# Altium PCB Papilio_WM.PcbDoc
Units mil, origin at the board's own origin, x right, y up, seen from the top; angles counter-clockwise.
Board outline 1830.71 x 1425.2 mil, 2 copper layers (Top Layer, Bottom Layer); 55 components, 34 nets, 144 pads, 628 vias.
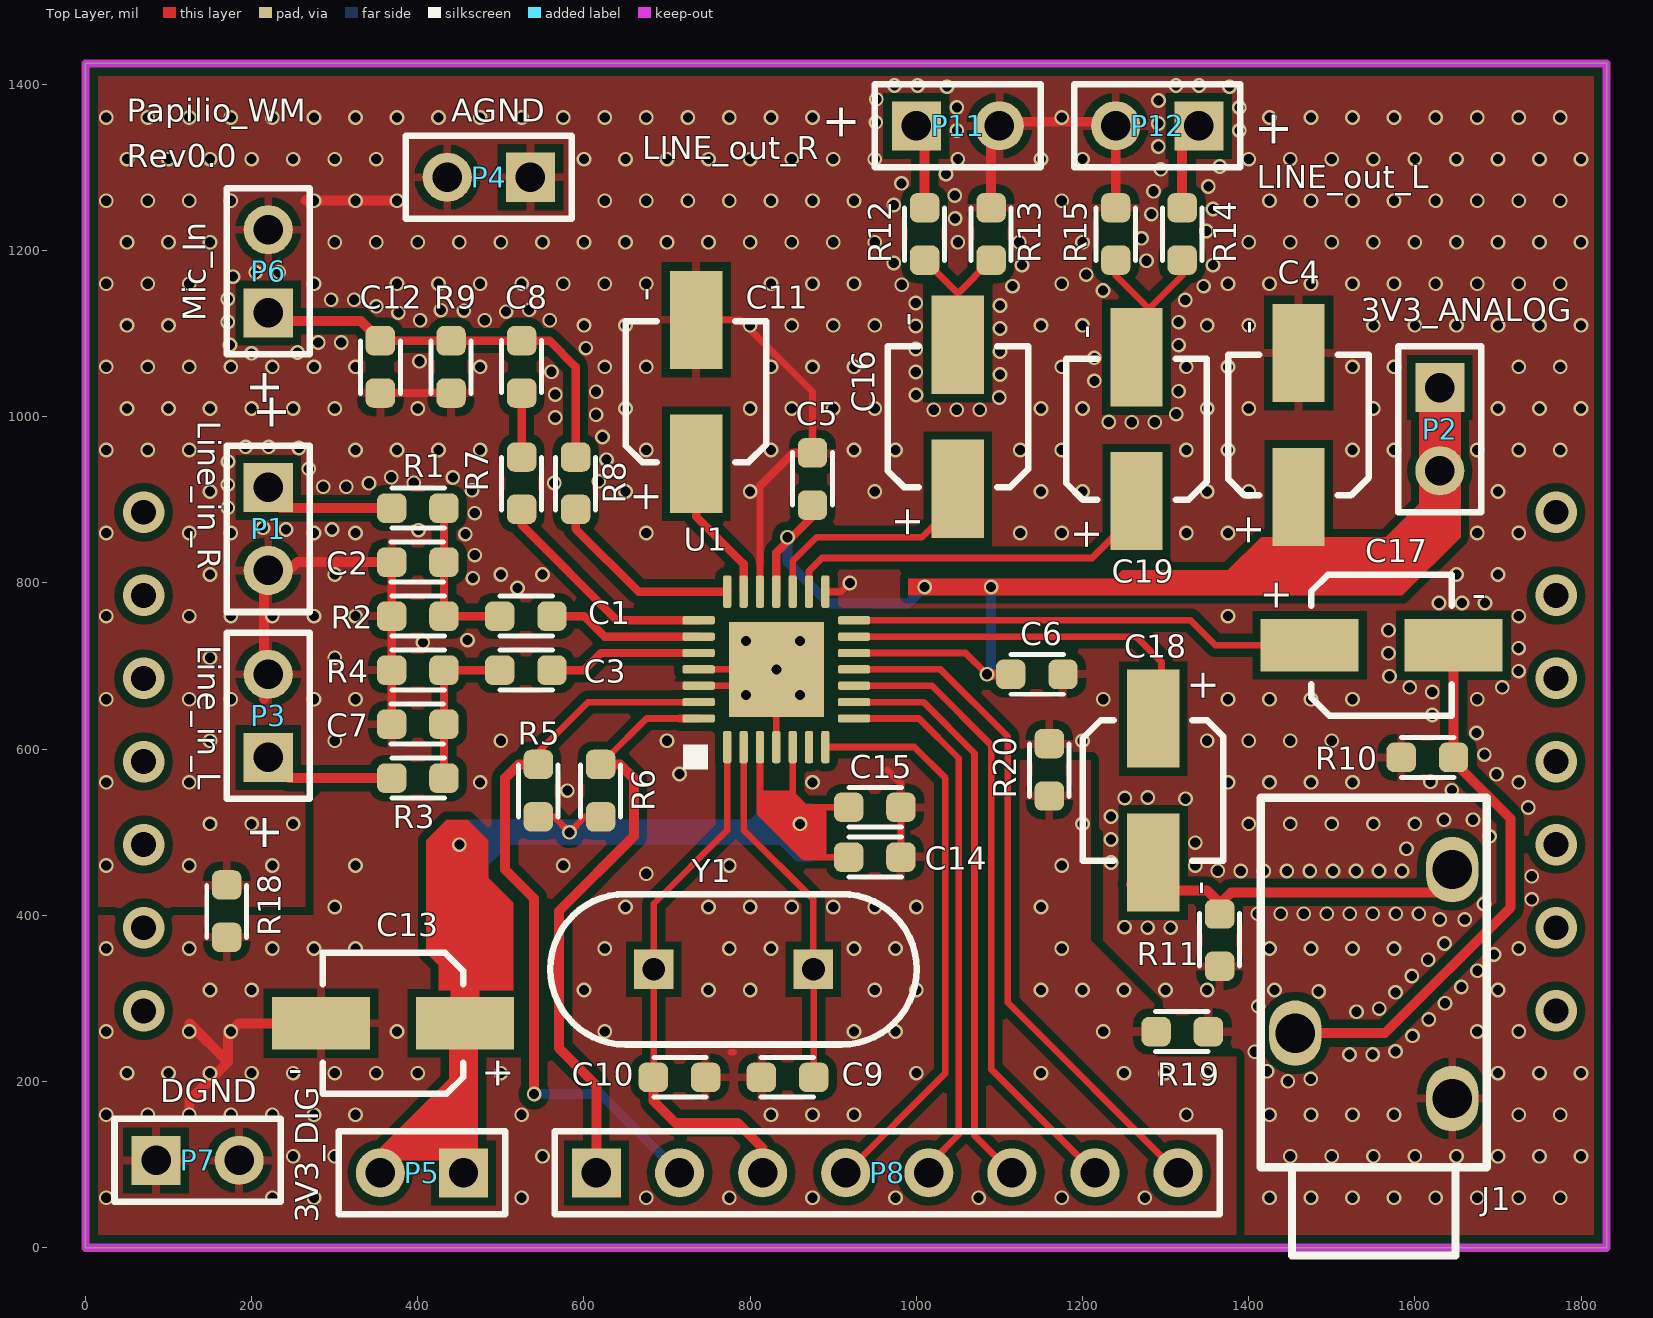
[diagram p0: Top Layer view]
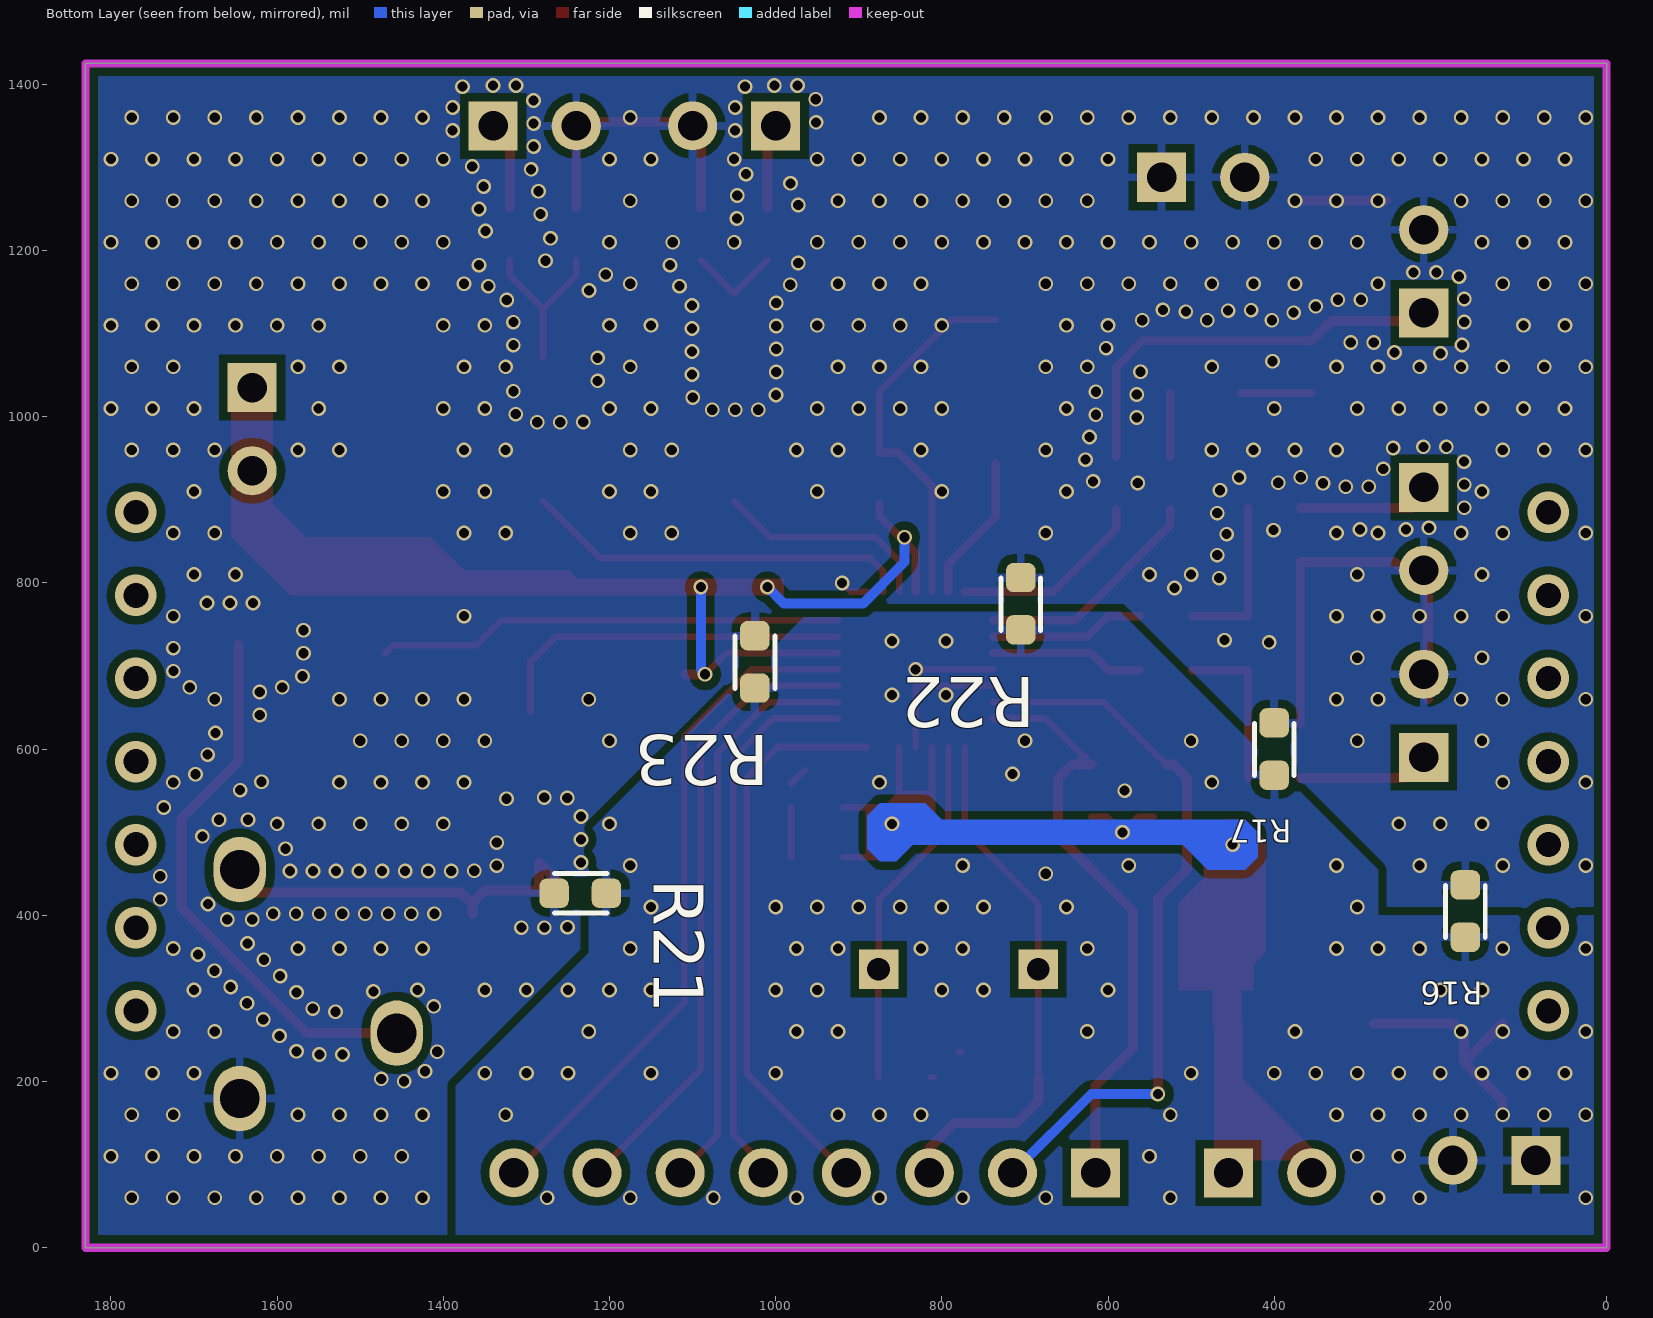
[diagram p1: Bottom Layer view, seen from below]
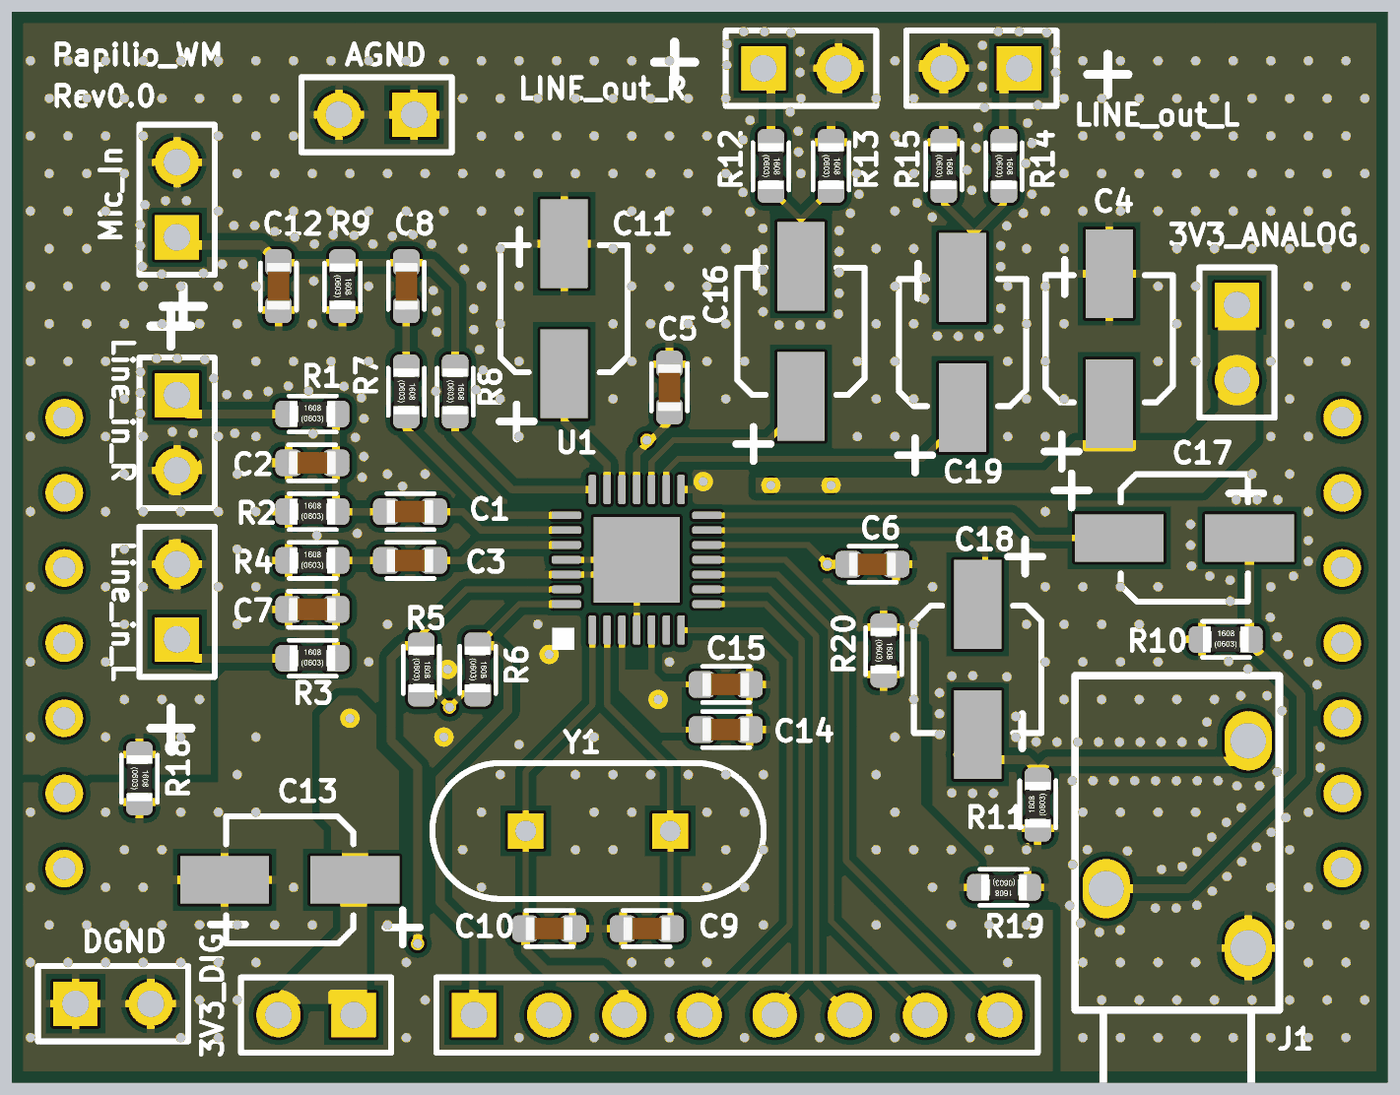
[diagram p2: 3D render of the assembled board from above, using the file's embedded part models]
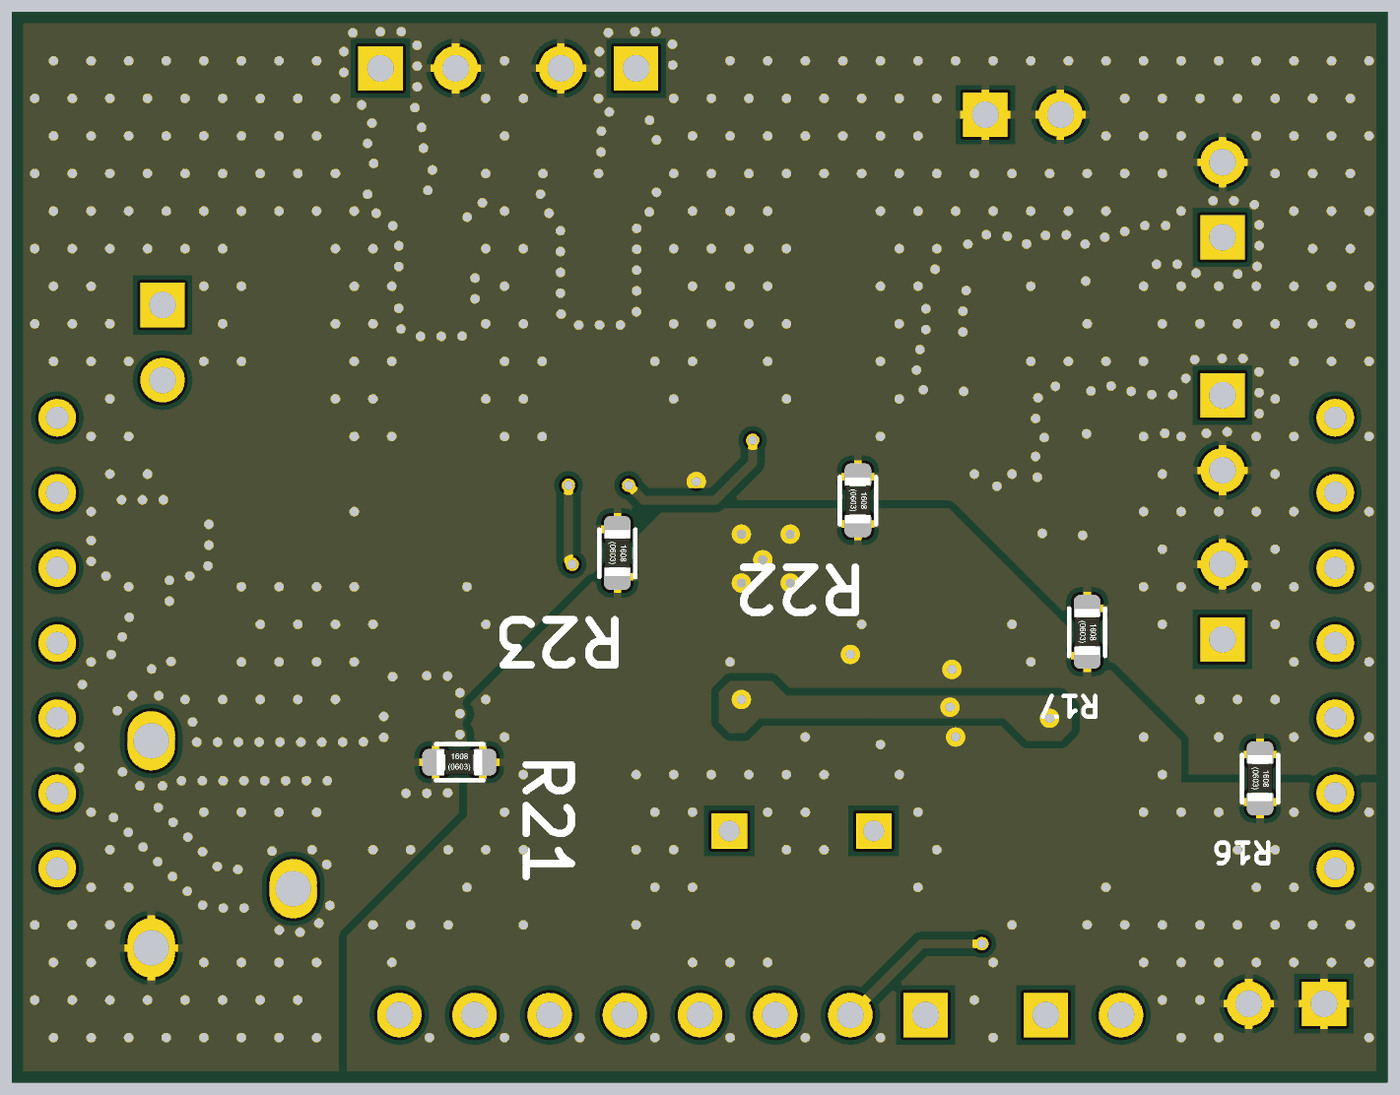
[diagram p3: 3D render of the assembled board from below, using the file's embedded part models]

## Layer stack, top to bottom
Top Solder: solder mask 0.4, Solder Resist, Dk 3.5
Top Layer: signal copper 1.4
Dielectric 1: dielectric 12.6, FR-4, Dk 4.8
Bottom Layer: signal copper 1.4
Bottom Solder: solder mask 0.4, Solder Resist, Dk 3.5

## Board outline
0,0 1830.71,0 1830.71,1425.2 0,1425.2

## Design rules (kind name [scope] priority, off if disabled: settings)
Clearance [All] p1: gap=10 ignorepadtopadclearanceinfootprint=FALSE except(0: Arc-Hole Track-Hole SMDPad-Hole THPad-Hole Via-Hole Fill-Hole Poly-Hole Region-Hole Text-Hole; 6: Arc-Text Track-Text SMDPad-SMDPad SMDPad-Text THPad-Text Via-Text Fill-Text Poly-Text Region-Text Text-Text; 8: Arc-Arc Arc-Track Arc-SMDPad Track-Track Track-SMDPad)
HoleSize [All] p1: absolutevalues=TRUE maxlimit=100 minlimit=12.2 maxpercent=80.000 minpercent=20.000
MinimumSolderMaskSliver [All] p1: minsoldermaskwidth=3.94
PolygonConnect [All] p1: thpad.connectstyle=Relief thpad.reliefconductorwidth=10 thpad.reliefentries=4 thpad.polygonreliefangle="90 Angle" thpad.airgapwidth=10 smdpad.connectstyle=Relief smdpad.reliefconductorwidth=10 smdpad.reliefentries=4 smdpad.polygonreliefangle="90 Angle" smdpad.airgapwidth=10 via.connectstyle=Direct via.reliefconductorwidth=10 via.reliefentries=4 via.polygonreliefangle="90 Angle" via.airgapwidth=10
RoutingVias [All] p1: holewidth=28 width=50 viastyle="Through Hole" minholewidth=28 minwidth=50 maxholewidth=28 maxwidth=50 useviatemplates=TRUE viatemplateguid#1={E91FFBB6-2468-46B7-9EDF-650C0B199D72} viatemplatename#1=v45h31
SilkToSilkClearance [All] p1: silktosilkclearance=1.97
SilkToSolderMaskClearance [IsPad] p1: minsilkscreentomaskgap=1.97 clearancetoexposedcopper=TRUE
SolderMaskExpansion [All] p1: expansion=4
Width [All] p1: maxlimit=35 minlimit=8 preferedwidth=12 minimp=50.000000 maximp=50.000000 favimp=50.000000
26 further rules are at their usual default settings.

## Components (designator, comment, footprint, x,y, rotation, side; value= is the part's Value field where it differs from the comment)
C1 "Cap" "C0603 - rounded" 530,760 r180 top value=10uF
C2 "Cap" "C0603 - rounded" 400,825 r0 top value=10uF
C3 "Cap" "C0603 - rounded" 530,695 r180 top value=10uF
C4 "Cap2" "CAP Eletrolitico 4x5.3 SMD" 1460,990 r270 top value=10uF
C5 "Cap" "C0603 - rounded" 875,925 r270 top value=100nF
C6 "Cap" "C0603 - rounded" 1145,690 r180 top value=100nF
C7 "Cap" "C0603 - rounded" 400,630 r0 top value=10uF
C8 "Cap" "C0603 - rounded" 525,1060 r270 top value=1uF
C9 "Cap" "C0603 - rounded" 845,205 r0 top value=22pF
C10 "Cap" "C0603 - rounded" 715,205 r180 top value=22pF
C11 "Cap2" "CAP Eletrolitico 4x5.3 SMD" 735,1030 r270 top value=10uF
C12 "Cap" "C0603 - rounded" 355,1060 r90 top value=220pF
C13 "Cap2" "CAP Eletrolitico 4x5.3 SMD" 370,270 r0 top value=10uF
C14 "Cap" "C0603 - rounded" 950,470 r180 top value=100nF
C15 "Cap" "C0603 - rounded" 950,530 r180 top value=100nF
C16 "Cap2" "CAP Eletrolitico 4x5.3 SMD" 1050,1000 r270 top value=10uF
C17 "Cap2" "CAP Eletrolitico 4x5.3 SMD" 1560,725 r180 top value=220uF
C18 "Cap2" "CAP Eletrolitico 4x5.3 SMD" 1285,550 r90 top value=220uF
C19 "Cap2" "CAP Eletrolitico 4x5.3 SMD" 1265,985 r270 top value=10uF
J1 "Stereo audio connector" "HEADPHONE PLUG" 1550.51,317.2 r90 top
P1 "Line_in_R" "HDR1X2 signed" 220,915 r90 top
P2 "3V3_ANALOG" HDR1X2 1630,1035 r270 top
P3 "Line_in_L" "HDR1X2 signed" 220,590 r270 top
P4 "AGND" HDR1X2 535.47,1288.19 r180 top
P5 "3V3_DIG" HDR1X2 455,90 r180 top
P6 "Mic_In" "HDR1X2 signed" 220,1125 r270 top
P7 "DGND" HDR1X2 85,105 r0 top
P8 "Header 8" HDR1X8 615,90 r0 top
P11 "LINE_out_R" "HDR1X2 signed" 1000,1350 r180 top
P12 "LINE_out_L" "HDR1X2 signed" 1340,1350 r0 top
R1 "Res1" "R0603 - rounded" 400,890 r0 top value=4k7
R2 "Res1" "R0603 - rounded" 400,760 r0 top value=4k7
R3 "Res1" "R0603 - rounded" 400,565 r0 top value=4k7
R4 "Res1" "R0603 - rounded" 400,695 r0 top value=4k7
R5 "Res1" "R0603 - rounded" 545,550 r270 top value=4k7
R6 "Res1" "R0603 - rounded" 620,550 r270 top value=4k7
R7 "Res1" "R0603 - rounded" 525,920 r270 top value=10k
R8 "Res1" "R0603 - rounded" 590,920 r270 top value=680R
R9 "Res1" "R0603 - rounded" 440,1060 r270 top value=47k
R10 "Res1" "R0603 - rounded" 1615,590 r0 top value=22k
R11 "Res1" "R0603 - rounded" 1365,370 r90 top value=22k
R12 "Res1" "R0603 - rounded" 1010,1220 r270 top value=100R
R13 "Res1" "R0603 - rounded" 1090,1220 r270 top value=47k
R14 "Res1" "R0603 - rounded" 1320,1220 r270 top value=100R
R15 "Res1" "R0603 - rounded" 1240,1220 r270 top value=47k
R16 "Res1" "R0603 - rounded" 170,405 r270 bottom value=0R
R17 "Res1" "R0603 - rounded" 400,600 r270 bottom value=0R
R18 "Res1" "R0603 - rounded" 170,405 r270 top value=0R
R19 "Res1" "R0603 - rounded" 1320,260 r180 top value=0R
R20 "Res1" "R0603 - rounded" 1160,575 r270 top value=0R
R21 "Res1" "R0603 - rounded" 1235.2,426.47 r180 bottom value=0R
R22 "Res1" "R0603 - rounded" 705,775 r270 bottom value=0R
R23 "Res1" "R0603 - rounded" 1025,705 r270 bottom value=0R
U1 "WM8731" QFN24 772.44,602.44 r0 top
Y1 "12MHZ or 12.288MHz or 18.432MHz" XTAL 780,335 r180 top

## Footprints (in the part's own frame and the unit in brackets; to place one, negate y for a bottom-side part, rotate by r counter-clockwise, add the part's x,y. Pads: shape width x height; smd on the part's side, far side on the other; paste and mask are expansions set on the pad)
"C0603 - rounded" [mm]
  rrect50% 0.9x0.9 smd: 1(-0.8,0) 2(0.8,0)
  Top Layer pour cut-out: -0.3,0.457 -0.3,-0.419 0.3,-0.419 0.3,0.457
  silkscreen extent -0.81,-0.61 0.79,0.61, body extent -0.8,-0.4 0.8,0.4, height 0.8
"CAP Eletrolitico 4x5.3 SMD" [mm] "CAP Eletrolitico 4x5.3 SMD"
  rect 3x1.6 smd: 1(2.2,0) 2(-2.2,0)
  silkscreen extent -2.15,-2.15 2.15,2.15
HDR1X2 [mm] "Connector; Header; 2 Position"
  rect 1.5x1.5 hole 0.9: 1(0,0)
  round 1.5 hole 0.9: 2(2.54,0)
  silkscreen extent -1.27,-1.27 3.81,1.27
"HDR1X2 signed" [mm] "HDR1X2 signed"
  rect 1.5x1.5 hole 0.9: 1(0,0)
  round 1.5 hole 0.9: 2(-2.54,0)
  silkscreen extent -3.81,-1.27 1.27,1.27
HDR1X8 [mm] "Connector; Header; 8 Position"
  rect 1.5x1.5 hole 0.9: 1(0,0)
  round 1.5 hole 0.9: 2(2.54,0) 3(5.08,0) 4(7.62,0) 5(10.16,0) 6(12.7,0) 7(15.24,0) 8(17.78,0)
  silkscreen extent -1.27,-1.27 19.05,1.27
"HEADPHONE PLUG" [mm] "3.5mm stereo phone connector"
  oval 2x1.6 hole 1.2: 1(3.5,-2.4) 3(-3.5,-2.4) 5(-1.5,2.4)
  silkscreen extent -8.3,-3.45 5.7,3.45
QFN24 [mil]
  rrect50% 10x39 smd: 1(0,0) 2(19.69,0) 3(39.37,0) 4(59.06,0) 5(78.74,0) 6(98.43,0) 7(118.11,0) 15(118.11,187.01) 16(98.43,187.01) 17(78.74,187.01) 18(59.06,187.01) 19(39.37,187.01) 20(19.69,187.01) 21(0,187.01)
  rrect50% 39x10 smd: 8(152.56,34.45) 9(152.56,54.13) 10(152.56,73.82) 11(152.56,93.5) 12(152.56,113.19) 13(152.56,132.87) 14(152.56,152.56) 22(-34.45,152.56) 23(-34.45,132.87) 24(-34.45,113.19) 25(-34.45,93.5) 26(-34.45,73.82) 27(-34.45,54.13) 28(-34.45,34.45)
  rect 114.17x114.17 smd: 25(59.06,93.5)
  silkscreen extent -53,-27 -24,3, body extent -40,-9 162,194, height 39
"R0603 - rounded" [mm]
  rrect50% 0.9x0.9 smd: 1(-0.8,0) 2(0.8,0)
  Top Layer pour cut-out: -0.3,0.5 0.3,0.5 0.3,-0.5 -0.3,-0.5
  silkscreen extent -0.79,-0.61 0.81,0.61, body extent -0.77,-0.42 0.78,0.43, height 0.45
XTAL [mm] "Cristal"
  rect 1.2x1.2 hole 0.7: 1(-2.44,0) 2(2.44,0)
  silkscreen extent -5.6,-2.3 5.6,2.3, body extent -5.6,-2.3 5.6,2.3, height 3

## Part data
C1 C2 C3 C4 C5 C6 C7 C8 C9 C10 C11 C12 C13 C14 C15 C16 C17 C18 C19: "Capacitor", Publisher="Altium Limited"
  C1 C2 C3 C5 C6 C7 C8 C9 C10 C12 C14 C15: LatestRevisionDate=17-Jul-2002, LatestRevisionNote="Re-released for DXP Platform.", PackageDescription="Radial Cap, Thru-Hole; 2 Leads; 0.3 in Pin Spacing", PackageReference=RAD-0.3, Published=8-Jun-2000
  C4 C11 C13 C16 C17 C18 C19: PackageDescription="Capacitor; 2 Leads", PackageReference=CAPR5-4X5, Published=23-Sep-2002
J1: library part "Phonejack 3"
P1 P2 P3 P4 P5 P6 P7 P11 P12: library part "Header 2", "Header, 2-Pin", LatestRevisionDate=17-Jul-2002, LatestRevisionNote="Re-released for DXP Platform.", Publisher="Altium Limited"
P8: "Header, 8-Pin", LatestRevisionDate=17-Jul-2002, LatestRevisionNote="Re-released for DXP Platform.", Publisher="Altium Limited"
R1 R2 R3 R4 R5 R6 R7 R8 R9 R10 R11 R12 R13 R14 R15 R16 R17 R18 R19 R20 R21 R22 R23: "Resistor", LatestRevisionDate=17-Jul-2002, LatestRevisionNote="Re-released for DXP Platform.", PackageDescription="Axial Device, Thru-Hole; 2 Leads; 0.3 in Pin Spacing", PackageReference=AXIAL-0.3, Published=8-Jun-2000, Publisher="Altium Limited"
U1: "Audio CODEC"
Y1: library part XD-49US-A

## Via types
v1: diameter 17.72, hole 12.2, Top Layer to Bottom Layer, tented both sides, 597 vias
v2: diameter 17.72, hole 12.2, Top Layer to Bottom Layer, 17 vias
v3: diameter 50/50 (per signal layer), hole 30, Top Layer to Bottom Layer, 14 vias

## Nets (pads, with @x,y where several pads share a name; then routed paths per layer and width w, separated by ;. In a path a pad name is that pad's centre, name@x,y a point inside that pad or via, vN(x,y) a via of type N, cw(c..) or ccw(c..) an arc to the next point about the centre after c; other vN are vias at no path point)
3V3_ANALOG: C4.1 C5.2 C6.2 P2.1 P2.2 U1.12 U1.18 | length 648.8
  Top Layer w8: U1.12 1059.37,715.63 v2(1085,690)
  Top Layer w10: U1.18 831.5,836.5 875,880 C5.2@875,895
  Top Layer w12: v2(1085,690) C6.2@1108.5,690
  Bottom Layer w12: v2(845,855) 845,825 895,775 990,775 v2(1010,795) ; v2(1085,690) 1090,695 v2(1090,795)
3V3_DIG: C13.1 C14.2 C15.2 P5.1 P5.2 R5.2 R6.2 U1.3 U1.5 | length 681.3
  Top Layer w8: R5.2 563.75,518.51 v2(582.5,499.76) 601.25,518.51 R6.2 ; U1.3 811.81,523.19 865,470 C14.2 ; 851.18,543.82 U1.5 ; 865,530 C15.2
  Top Layer w35: P5.1 C13.1@455,270 ; 455,360 456.61,358.39 C13.1
  other v2: 450,485 860,510
AGND: C2.1 C4.2 C5.1 C6.1 C7.1 C11.2 C12.1 J1.3 P1.2 P3.2 P4.1 P4.2 P6.2 P11.2 P12.2 R2.1 R4.1 R9.2 R10.1 R11.1 R13.1 R15.1 R16.1 R17.1 R18.1 R19.1 R20.1 R21.1 R22.1 R23.1 U1.15 U1.19 | length 1557.3
  Top Layer w8: C11.2 788.39,1116.61 875,1030 C5.1 ; U1.19 811.81,916.81 ; U1.15 909.45,789.45 v2(920,800)
  Top Layer w10: C12.1 R9.2 ; C7.1 R4.1 R2.1 C2.1 ; 811.81,916.81 851.5,956.5 C5.1
  Top Layer w12: 215,660 P1.2@215,805 ; P1.2 215,810 P1.2@215,805 ; v1(275,1260) 265,1260 v1(325,1260) v1(375,1260) ; C2.1 255,825 235,805 P1.2@215,805 ; R13.1 1090,1345 1100,1355 1235,1355 P12.2 R15.1
  other v1: 1425,60 1475,60 1525,60 1575,60 1625,60 1675,60 1725,60 1775,60 1450,110 1500,110 1550,110 1600,110 1650,110 1700,110 1750,110 1800,110 1425,160 1475,160 1525,160 1575,160 1725,160 1775,160 1447.1,200.29 1474.67,203.1 1700,210 1750,210 1800,210 1422.14,212.34 1521.42,232.43 1549.14,232.43 1407.36,235.79 1576.6,236.2 1597.11,254.84 1675,260 1725,260 1616.71,274.44 1529.68,283.87 1557.14,287.63 1411.48,290.36 1636.31,294.04 1576.74,307.23 1484.23,308.32 1300,310 1350,310 1430.96,310.08 1700,310 1655.9,313.64 1596.34,326.82 1675.5,333.24 1615.94,346.42 1695.1,352.84 1425,360 1475,360 1525,360 1575,360 1725,360 1635.53,366.02 1278.35,385.1 1306.07,385.1 1250.64,385.67 1630,395 1660,395 1410.79,401.86 1438.51,401.86 1466.22,401.86 1493.94,401.86 1521.66,401.86 1549.37,401.86 1577.09,401.86 1604.81,401.86 1683.23,413.63 1740.72,419.16 1740.72,446.88 1390.47,453.3 1418.19,453.3 1445.91,453.3 1473.62,453.3 1501.34,453.3 1529.05,453.3 1556.77,453.3 1584.49,453.3 1362.76,453.61 25,460 125,460 225,460 1335.72,459.73 1234.28,463.42 1590,480 1335.72,487.44 1234.28,491.13 1690,495 150,510 200,510 250,510 1400,510 1450,510 1500,510 1550,510 1600,510 1635,515 1670,515 1234.28,518.85 1736.52,529.71 1323.85,540.21 1250.77,541.12 1278.48,541.67 1644.53,550.6 25,560 125,560 1375,560 1425,560 1475,560 1525,560 1725,560 1618.69,560.64 1698.16,569.71 1683.61,593.3 150,610 300,610 1200,610 1350,610 1400,610 1450,610 1500,610 1674.26,619.39 1620.89,640.92 25,660 125,660 175,660 275,660 325,660 1225,660 1375,660 1425,660 1475,660 1525,660 1675,660 1620.89,668.64 1593.75,674.28 1705.2,674.28 1569.49,687.67 1724.9,693.78 150,710 300,710 1568.33,715.37 1724.9,721.5 406.09,728.42 459.73,731.08 1568.33,743.08 25,760 125,760 175,760 225,760 275,760 325,760 1375,760 1725,760 1628.98,775.72 1656.7,775.72 1684.42,775.72 520.09,793.77 466.24,805.76 150,810 300,810 500,810 550,810 1650,810 1700,810 468.61,833.38 457.25,858.65 25,860 125,860 175,860 275,860 325,860 675,860 1125,860 1175,860 1325,860 1375,860 1675,860 1725,860 400.88,863.46 241.44,864.28 296.87,864.28 213.79,866.24 468.61,883.93 171.24,890.53 150,910 650,910 800,910 950,910 1150,910 1200,910 1350,910 1400,910 1700,910 465.32,911.46 286.22,915.72 313.94,915.72 171.24,918.24 341.33,919.98 564.22,920.17 395.05,920.61 617.91,922.24 368.11,927.12 442.21,926.75 268.76,937.25 171.53,945.96 627.12,948.38 25,960 75,960 125,960 325,960 375,960 425,960 475,960 675,960 825,960 925,960 975,960 1125,960 1175,960 1325,960 1375,960 1525,960 1575,960 1675,960 1725,960 1775,960 256.89,962.29 192.78,963.76 220.49,963.76 622.39,975.69 1259.22,993.33 1286.93,993.33 1231.5,993.73 565.36,999.13 614.64,1002.31 1312.87,1003.12 1020.88,1008.33 1048.6,1008.33 1076.32,1008.33 50,1010 100,1010 150,1010 200,1010 250,1010 300,1010 400,1010 650,1010 800,1010 850,1010 900,1010 950,1010 1150,1010 1200,1010 1350,1010 1400,1010 1550,1010 1700,1010 1750,1010 1800,1010 1099.82,1023.02 999.58,1026.06 565.36,1026.85 614.64,1030.02 1315.72,1030.68 1214.28,1043.16 1100.72,1050.72 560.95,1054.21 999.28,1053.77 25,1060 75,1060 125,1060 175,1060 225,1060 275,1060 325,1060 475,1060 625,1060 675,1060 825,1060 875,1060 925,1060 1175,1060 1325,1060 1375,1060 1525,1060 1575,1060 1725,1060 1775,1060 401.97,1066.85 1214.28,1070.87 199.74,1076.24 255.15,1077.36 1100.72,1078.44 999.28,1081.49 602.29,1082.55 173.92,1086.31 1315.72,1086.12 280.18,1089.28 307.89,1089.28 1100.72,1106.16 999.28,1109.2 50,1110 100,1110 600,1110 650,1110 800,1110 850,1110 900,1110 950,1110 1150,1110 1200,1110 1350,1110 1400,1110 1550,1110 1600,1110 1650,1110 1700,1110 1750,1110 1800,1110 171.24,1113.9 1315.72,1113.83 402.81,1116.13 480.65,1116.14 558.74,1116.09 376.64,1125.25 506.36,1126.49 427.74,1128.25 455.45,1127.68 534,1128.59 349.99,1132.88 1100.72,1133.87 999.28,1136.92 1323.69,1140.38 295.69,1140.72 323.41,1140.72 171.24,1141.61 1224.69,1151.99 1115.76,1157.16 1345.76,1157.16 982.42,1158.92 25,1160 75,1160 125,1160 275,1160 375,1160 425,1160 475,1160 525,1160 575,1160 625,1160 675,1160 825,1160 875,1160 925,1160 1175,1160 1375,1160 1425,1160 1475,1160 1525,1160 1575,1160 1625,1160 1675,1160 1725,1160 1775,1160 177.58,1168.59 1204.53,1171.01 204.81,1173.76 232.53,1173.76 1127.12,1182.44 1357.12,1182.44 972.89,1184.95 1277.12,1187.69 50,1210 100,1210 150,1210 300,1210 350,1210 400,1210 450,1210 500,1210 550,1210 600,1210 650,1210 700,1210 750,1210 800,1210 850,1210 900,1210 950,1210 1050,1210 1123.83,1209.96 1200,1210 1400,1210 1450,1210 1500,1210 1550,1210 1600,1210 1650,1210 1700,1210 1750,1210 1800,1210 1270.96,1214.71 1349.13,1223.47 1046.7,1238.65 1282.89,1243.81 1357.12,1250.01 972.89,1254.78 25,1260 75,1260 125,1260 175,1260 625,1260 675,1260 725,1260 775,1260 825,1260 875,1260 925,1260 1175,1260 1425,1260 1475,1260 1525,1260 1575,1260 1625,1260 1675,1260 1725,1260 1775,1260 1046.3,1266.37 1285.53,1271.4 1351.43,1277.14 982.22,1280.88 1035.72,1291.99 1294.28,1297.7 1365.11,1301.24 50,1310 100,1310 150,1310 200,1310 250,1310 300,1310 350,1310 600,1310 650,1310 700,1310 750,1310 800,1310 850,1310 900,1310 950,1310 1050,1310 1150,1310 1200,1310 1400,1310 1450,1310 1500,1310 1550,1310 1600,1310 1650,1310 1700,1310 1750,1310 1800,1310 1291.25,1325.25 1048.76,1344.53 1388.76,1344.53 1291.25,1352.96 951.24,1354.31 25,1360 75,1360 125,1360 175,1360 225,1360 275,1360 325,1360 375,1360 425,1360 475,1360 525,1360 575,1360 625,1360 675,1360 725,1360 775,1360 825,1360 875,1360 1175,1360 1425,1360 1475,1360 1525,1360 1575,1360 1625,1360 1675,1360 1725,1360 1775,1360 1048.76,1372.25 1388.76,1372.24 1291.48,1380.68 951.74,1382.02 1036.89,1397.29 1376.89,1397.29 973.84,1398.76 1001.55,1398.76 1312.49,1398.75 1340.21,1398.75
AUD_ADCDAT: P8.7 U1.10 | length 761.3
  Top Layer w8: U1.10 1018.74,676.26 1090,605 1090,215 P8.7
AUD_ADCLRCK: P8.8 U1.11 | length 828.4
  Top Layer w8: U1.11 1029.06,695.94 1110,615 1110,295 P8.8
AUD_BCLK: P8.4 U1.7 | length 684.7
  Top Layer w8: U1.7 997.56,602.44 1035,565 1035,210 P8.4
AUD_DACDAT: P8.5 U1.8 | length 667.7
  Top Layer w8: U1.8 1003.11,636.89 1051,589 1051,136 1020,105 P8.5@995,105
AUD_DACLRCK: P8.6 U1.9 | length 694.1
  Top Layer w8: U1.9 1008.43,656.57 1070,595 1070,135 P8.6
AUD_XCK: C10.2 P8.3 U1.1 Y1.2 | length 647.7
  Top Layer w8: C10.2 683.94,205.43 Y1.2 683.94,413.94 772.44,502.44 U1.1
  Top Layer w12: C10.2 683.51,176.49 710,150 785,150 815,120 P8.3
GND: C9.1 C10.1 C13.2 C14.1 C15.1 P7.1 P7.2 R16.2 R17.2 R18.2 R19.2 R20.2 R21.2 R22.2 R23.2 U1.4 U1.25 U1.26 | length 636.2
  Top Layer w8: U1.26 830.24,676.26 831.5,675 U1.4 ; U1.25@737.99,695.94 v2(831.5,695.94) ; 776.5,235 780,235 ; C9.1@810,205 C9.1 ; 965,575 981.5,558.5 ; C14.1 C15.1
  Top Layer w12: 125,170 125,176.77 171.61,223.39 ; 125,270 171.61,223.39 ; C13.2@280,270 185,270 v1(175,260) 171.61,256.61 171.61,223.39
  other v1: 25,60 225,60 275,60 525,60 675,60 775,60 875,60 975,60 1075,60 1175,60 1275,60 250,110 300,110 550,110 25,160 75,160 125,160 175,160 225,160 275,160 325,160 525,160 825,160 875,160 925,160 1325,160 50,210 100,210 150,210 200,210 250,210 300,210 350,210 400,210 500,210 1000,210 1150,210 1250,210 1300,210 1350,210 25,260 125,260 375,260 625,260 925,260 975,260 1225,260 150,310 200,310 600,310 750,310 800,310 950,310 1000,310 1150,310 1200,310 1250,310 25,360 125,360 225,360 275,360 325,360 625,360 775,360 825,360 925,360 975,360 1175,360 300,410 650,410 750,410 800,410 850,410 900,410 950,410 1000,410 1150,410 675,450 325,460 775,460 1175,460 1200,510 475,560 875,560 500,610 700,610
  other v2: 575,460 580,550 715,570 795,665 860,665 795,730 860,730
I2C_SCLK: P8.2 R5.1 U1.27 | length 889.8
  Top Layer w8: R5.1@530,581.5 605.08,656.57 U1.27
  Top Layer w12: R5.1@530,581.5 521.5,581.5 505,565 505,455 540,420 v2(540,185) ; P8.2@705,90 P8.2
  Bottom Layer w12: v2(540,185) 620,185 P8.2
I2C_SDAT: P8.1 R6.1 U1.28 | length 718.7
  Top Layer w8: R6.1@628,589.5 675.39,636.89 715.39,636.89
  Top Layer w10: 715.39,636.89 U1.28
  Top Layer w12: P8.1 615,195 570,240 570,405 660,495 660,565 643.5,581.5 R6.1@636,581.5 ; R6.1 R6.1@636,581.5 ; R6.1@628,589.5 R6.1@636,581.5
NetC1_1: C1.1 U1.23 | length 186.7
  Top Layer w10: C1.1 600,760 624.69,735.31 U1.23
NetC1_2: C1.2 C2.2 R1.2 R2.2 | length 197
  Top Layer w10: R1.2 C2.2 R2.2 C1.2
NetC3_1: C3.1 U1.24 | length 185
  Top Layer w10: C3.1 600,695 620.63,715.63 U1.24
NetC3_2: C3.2 C7.2 R3.2 R4.2 | length 197
  Top Layer w10: R3.2 C7.2 R4.2 C3.2
NetC8_1: C8.1 C12.2 P6.1 R8.1 R9.1 | length 505.4
  Top Layer w10: C12.2 R9.1 C8.1 558.5,1091.5 590,1060 R8.1
  Top Layer w12: P6.1 230,1115 331.49,1115 C12.2
NetC8_2: C8.2 R7.1 | length 77
  Top Layer w10: R7.1 C8.2
NetC11_1: C11.1 U1.20 | length 177.6
  Top Layer w10: C11.1 735,880 792.13,822.87 U1.20
NetC16_1: C16.1 U1.17 | length 265.5
  Top Layer w8: U1.17 851.18,826.18 880,855 1006.61,855 C16.1@1050,898.39
NetC16_2: C16.2 R12.2 R13.2 | length 113.1
  Top Layer w8: R12.2 1050,1148.51 R13.2
NetC17_1: C17.1 U1.14 | length 561.6
  Top Layer w8: U1.14 1330,755 1360,725 1460,725 C17.1@1470,715
NetC17_2: C17.2 J1.5 R10.2 | length 665.8
  Top Layer w12: J1.5 1564.04,258.15 1715,409.11 1715,516.5 1646.49,585 1646.61,585.12 C17.2
NetC18_1: C18.1 U1.13 | length 442.6
  Top Layer w8: U1.13 925.31,735 1265,735 1295,705 C18.1@1295,645
NetC18_2: C18.2 J1.1 R11.2 | length 479.4
  Top Layer w12: C18.2@1258.51,436.89 C18.2 1285,430 1350,430 1365,415 R11.2@1365,413.66 ; R11.2 R11.2@1365,413.66 ; J1.1 1645,435 1637.58,427.58 1378.92,427.58 R11.2@1365,413.66
NetC19_1: C19.1 U1.16 | length 468.8
  Top Layer w8: U1.16 870.87,814.35 886.52,830 1211.61,830 C19.1@1280,898.39
NetC19_2: C19.2 R14.2 R15.2 | length 208.5
  Top Layer w8: R15.2 1240,1170 C19.2@1280,1130 ; C19.2@1280,1071.61 C19.2@1280,1130 ; R14.2 1320,1170 C19.2@1280,1130
NetP1_1: P1.1 R1.1 | length 154.7
  Top Layer w12: P1.1@220,905 235,890 R1.1
NetP3_1: P3.1 R3.1 | length 158.9
  Top Layer w12: P3.1 245,565 R3.1
NetP11_1: P11.1 R12.1 | length 107.6
  Top Layer w12: R12.1 1010,1345 P11.1@1020,1355
NetP12_1: P12.1 R14.1 | length 109.7
  Top Layer w12: R14.1 1320,1340 P12.1@1335,1355
NetR7_2: R7.2 U1.22 | length 279.1
  Top Layer w10: R7.2 525,870 640,755 U1.22
NetR8_2: R8.2 U1.21 | length 237.2
  Top Layer w10: R8.2 590,865 665.55,789.45 U1.21
XTAL2: C9.2 U1.2 Y1.1 | length 432.4
  Top Layer w8: U1.2 792.13,502.87 876.06,418.94 876.06,340 876.49,339.57 C9.2
pads on no net: U1.6
copper on no net:
  other v3: 70,285 1770,285 70,385 1770,385 70,485 1770,485 70,585 1770,585 70,685 1770,685 70,785 1770,785 70,885 1770,885

## Polygon pours and split planes (outlines as drawn)
AGND on Top Layer "Signal Layer 1-No Net" (solid, pour order 4): 0,1425.2 0,395 280,395 640,755 970,755 1225,500 1225,355 1385,195 1385,0 1830.71,0 1830.71,1425.2
GND on Top Layer "Signal Layer 1-No Net" (solid, remove dead copper, pour order 0): 0,0 0,400 275,400 275,540 500,765 960,765 1125,600 1125,586.81 1210,586.81 1210,370 1288.51,291.49 1288.51,230 1385,230 1385,0
AGND on Bottom Layer "Signal Layer 1-No Net" (solid, pour order 6): 0,1425.2 0,395 295,395 655,755 970,755 1225,500 1225,355 1385,195 1385,0 1830.71,0 1830.71,1425.2
GND on Bottom Layer "Signal Layer 1-No Net" (solid, pour order 2): 0,0 0,400 275,400 275,455 410,590 585,765 960,765 1225,500 1225,355 1385,195 1385,0

## Keep-outs
Keep-Out Layer:
  the board outline again, w10

## Other copper
Top Layer:
  region net 3V3_ANALOG: 1655,1035 1605,1035 1605,895 1565,855 1415,855 1375,815 1248.07,815 1238.07,805 990,805 990,785 1495,785 1585,785 1655,855
  region net 3V3_DIG: 425,310 425,340 410,355 410,490 435,515 460,515 485,490 485,445 515,415 515,310
  region net 3V3_DIG: 811.81,550 851.18,550 871.18,530 891.75,530 891.75,470 865,470 811.81,523.19
  region net 3V3_DIG: 355,105 455,105 455,220 355,120
Bottom Layer:
  region net 3V3_DIG: 875,535 890,520 890,480 875,465 855,465 835,485 510,485 480,455 435,455 420,470 420,500 435,515 800,515 820,535

## Silkscreen, mask and mechanical layers (free items; w line width, h text height)
Top Overlay:
  text "Papilio_WM" at 50,1355 h27.56
  text "Rev0.0" at 50,1300 h27.56
Mechanical 1:
  lines w10: 1830.71,0 0,0 0,1425.2 1830.71,1425.2 1830.71,4.14

## Text inside footprints (layer, text, board x,y; h text height)
C4: Top Overlay "+" at 1373.39,883.7 h60 r270; Top Overlay "-" at 1377.32,1115.98 h60 r270
C11: Top Overlay "+" at 648.39,923.7 h60 r270; Top Overlay "-" at 652.32,1155.98 h60 r270
C13: Top Overlay "+" at 476.3,183.39 h60; Top Overlay "-" at 244.02,187.32 h60
C16: Top Overlay "-" at 967.32,1125.98 h60 r270; Top Overlay "+" at 963.39,893.7 h60 r270
C17: Top Overlay "+" at 1453.7,811.61 h60 r180; Top Overlay "-" at 1685.98,807.68 h60 r180
C18: Top Overlay "+" at 1371.61,656.3 h60 r90; Top Overlay "-" at 1367.68,424.02 h60 r90
C19: Top Overlay "-" at 1182.32,1110.98 h60 r270; Top Overlay "+" at 1178.39,878.7 h60 r270
P1: Top Overlay "+" at 255.43,981.93 h70 r90
P3: Top Overlay "+" at 184.57,523.07 h70 r270
P6: Top Overlay "+" at 184.57,1058.07 h70 r270
P11: Top Overlay "+" at 933.07,1385.43 h70 r180
P12: Top Overlay "+" at 1406.93,1314.56 h70